# Allegro board ex2_rlc.brd
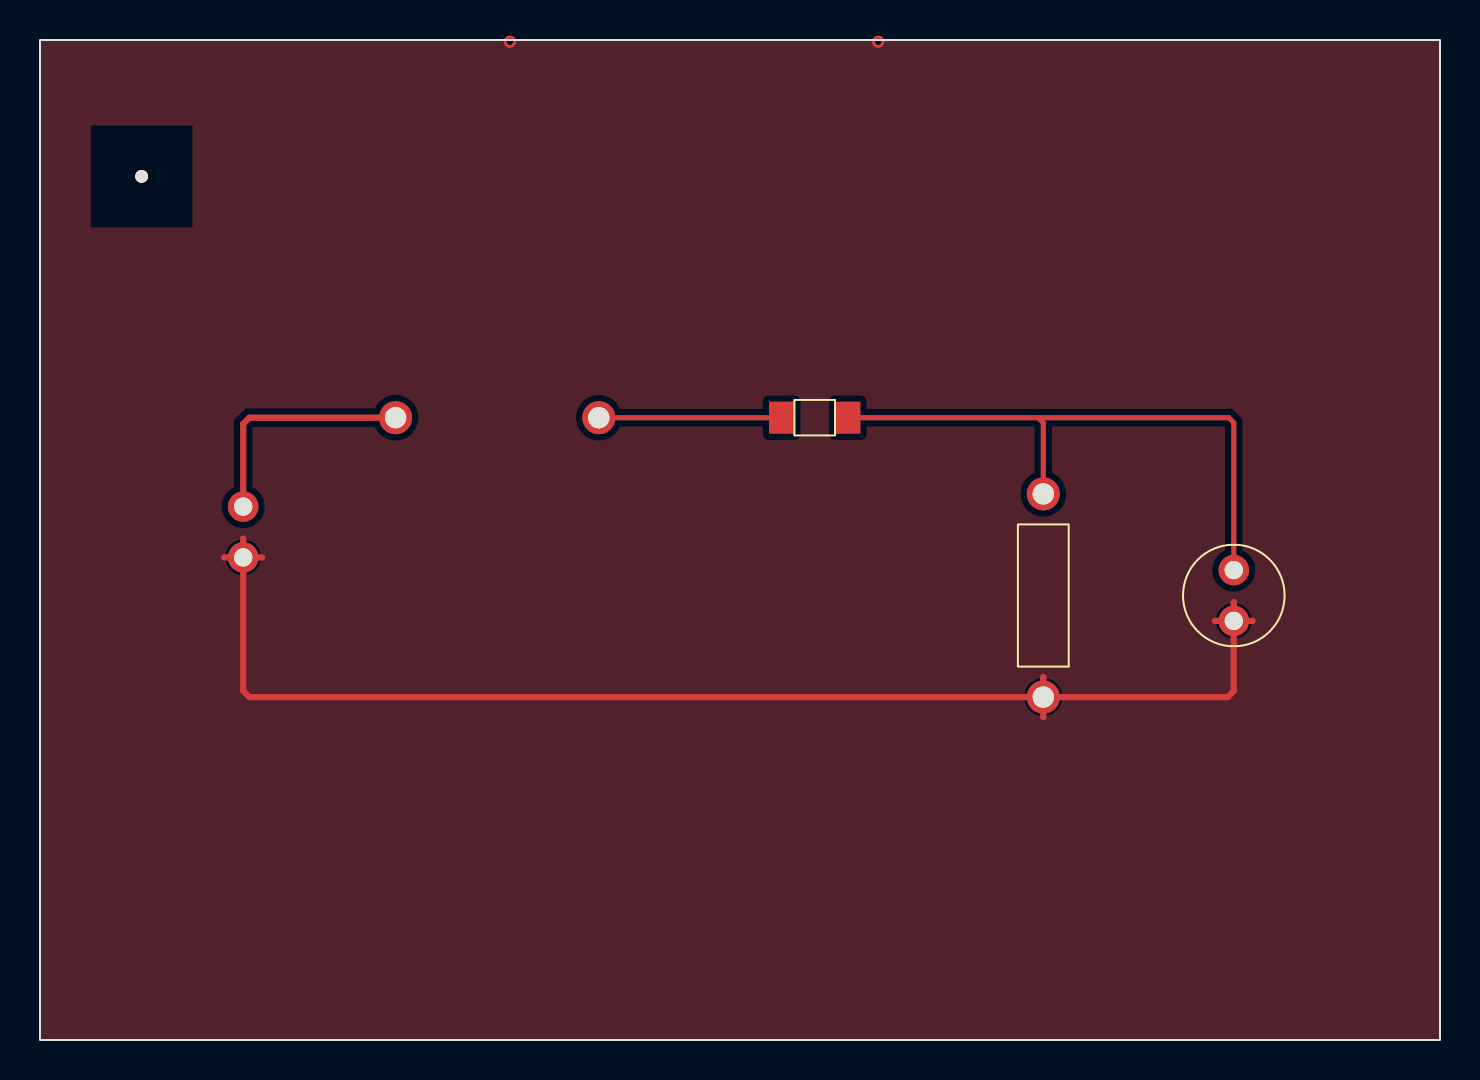
[diagram p0: board, top side]
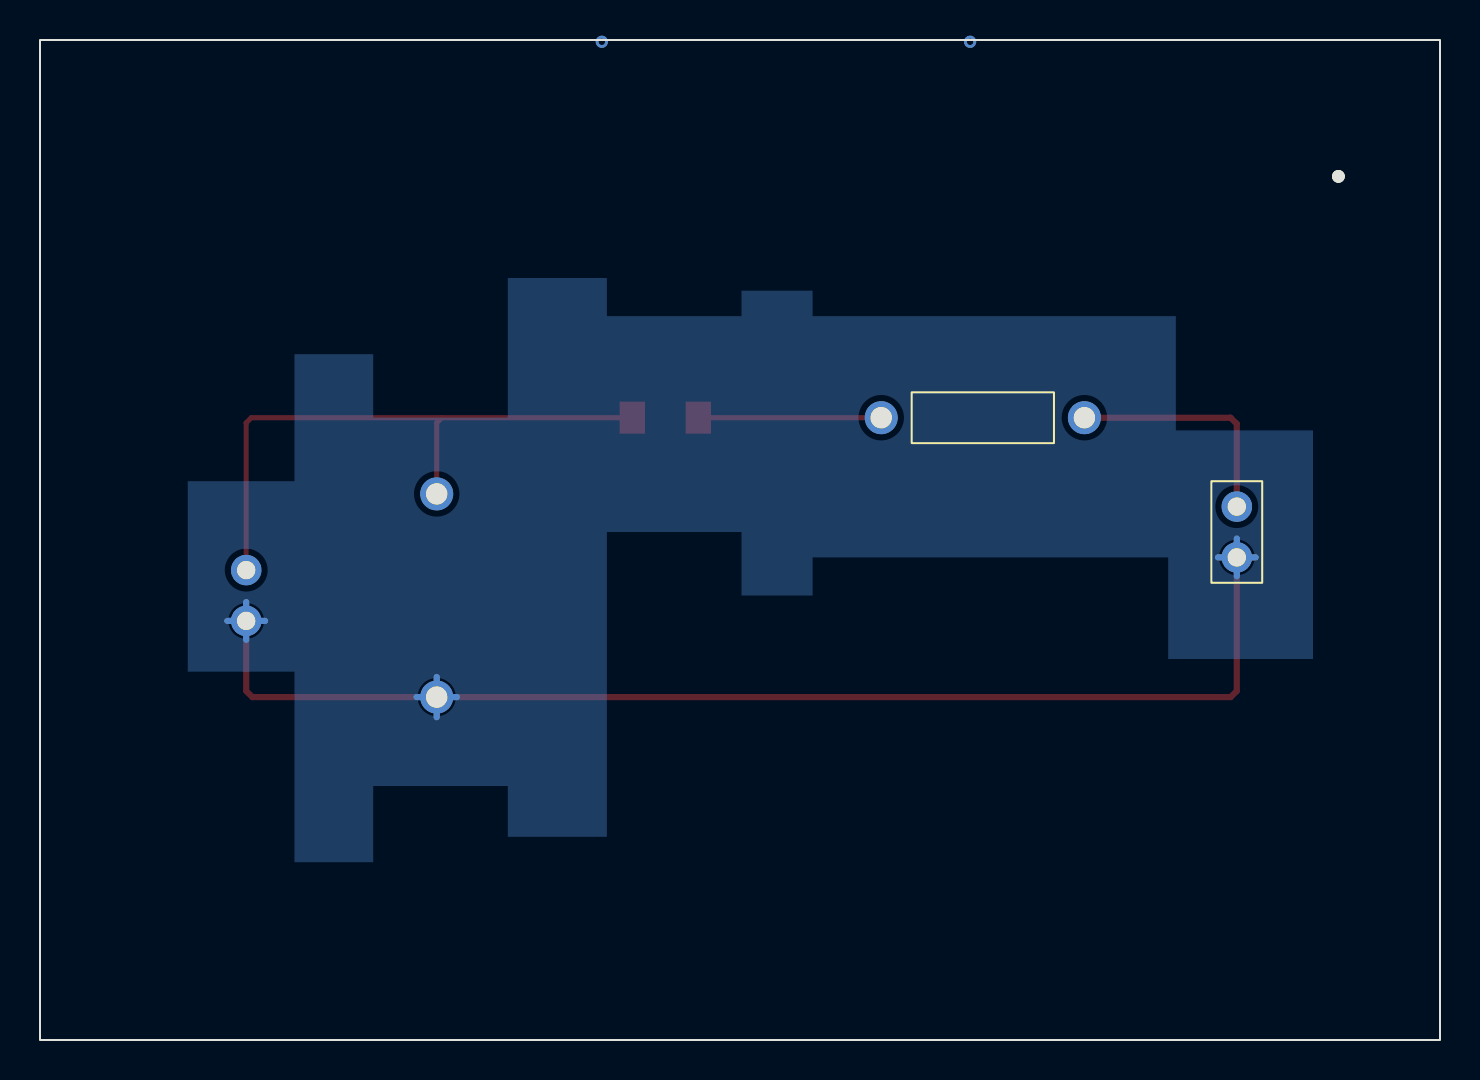
[diagram p1: board, bottom side, seen from below]

Outline 70 x 50 mm; copper layers: TOP, BOTTOM. Coordinates in mm from the lower left corner of the outline.
Outline path: rectangle 0,0 70,50

## Design rules (mm)
constraint set DEFAULT: min track width 0.254
net group BASENETS: nets KKK N00207
net group POWERNETS: nets VCC

## Placement (name value [footprint] x y rotation side)
C1  1u  [CAP196]  59.69 23.5 180 top
J1  CON2  [JUMPER2]  10.16 24.13 90 bottom
L1  100n  [SMDRES]  38.73 31.11 0 top
NOREF  -  [unnamed]  5.08 43.18 0 top
R1  330  [RES400]  17.78 31.11 90 bottom
R2  330  [RES400]  50.16 27.3 180 top

## Library data of the parts
C1 = CAP NP: Tolerance: ***; User Part Number: ***
J1 = CON2: User Part Number: ***
L1 = INDUCTOR: Tolerance: ***; User Part Number: ***
R1 R2 = R: Tolerance: ***; User Part Number: ***

## Footprints (pads in the part's own frame, mm; a bottom-side part is the same pattern mirrored in y, then rotated)
CAP196
  round 1.524 hole 0.914: 1(0,0) 2(0,2.54)
JUMPER2
  round 1.524 hole 0.914: 1(0,0) 2(2.54,0)
RES400
  round 1.651 hole 1.067: 1(0,0) 2(0,10.16)
SMDRES
  rect 1.27x1.6 smd: 1(-1.651,0) 2(1.651,0)
unnamed
  round 0.635 hole 3.175 unplated: (0,0)

## Nets
GND: C1.2 J1.1 R2.2
VCC: J1.2 R1.1
KKK: L1.1 R1.2
N00207: C1.1 L1.2 R2.1

## Via types
v1: diameter 0.61, hole 0.33, TOP to BOTTOM, 2 vias

## Routing (per net, layer and track width the routed paths; a pad name or vN(x,y) marks a point on that pad's centre or on a via; arc(x,y) is an arc through that point)
GND: length 79.2
  TOP w0.308: 50.16,16.14 R2.2 ; R2.2 59.38,17.14 59.69,17.45 C1.2 ; R2.2 50.16,18.15 ; R2.2 10.47,17.14 10.16,17.45 J1.1 ; J1.1 11.1,24.13 ; J1.1 9.22,24.13 ; J1.1 10.16,25.07 ; 58.75,20.95 C1.2 ; C1.2 60.63,20.95 ; C1.2 59.69,21.9
  BOTTOM w0.308: 58.75,20.95 C1.2 ; C1.2 60.63,20.95 ; C1.2 59.69,21.9 ; C1.2 59.69,20.01 ; 49.16,17.14 R2.2 ; R2.2 51.17,17.14 ; R2.2 50.16,16.14 ; R2.2 50.16,18.15 ; 10.16,23.19 J1.1 ; J1.1 10.16,25.07 ; J1.1 9.22,24.13 ; J1.1 11.1,24.13
  vias: v1(23.5,49.91) v1(41.91,49.91)
VCC: length 11.9
  TOP w0.308: J1.2 10.16,30.81 10.47,31.11 R1.1
KKK: length 9.1
  TOP w0.254: R1.2 L1.1
N00207: length 30.7
  TOP w0.254: 49.91,31.11 50.16,30.86 R2.1 ; 49.91,31.11 59.44,31.11 59.69,30.86 C1.1 ; 49.91,31.11 L1.2

## Copper pours and planes (outline as drawn; the poured copper is in the pictures)
GND on TOP: 0,0 0,50 70,50 70,0
GND on BOTTOM: 41.66,38.1 46.61,38.1 46.61,31.11 53.34,31.11 53.34,34.29 57.28,34.29 57.28,27.94 62.61,27.94 62.61,18.41 57.28,18.41 57.28,8.89 53.34,8.89 53.34,12.7 46.61,12.7 46.61,10.16 41.66,10.16 41.66,25.4 34.92,25.4 34.92,22.23 31.37,22.23 31.37,24.13 13.59,24.13 13.59,19.05 6.35,19.05 6.35,30.48 13.21,30.48 13.21,36.2 31.37,36.2 31.37,37.47 34.92,37.47 34.92,36.2 41.66,36.2
